# Altium PCB PCB2.PcbDoc
Units mm, origin at the board's own origin, x right, y up, seen from the top; angles counter-clockwise.
Board outline 43.94 x 37.52 mm, 2 copper layers (Top Layer, Bottom Layer); 57 components, 31 nets, 231 pads, 33 vias.
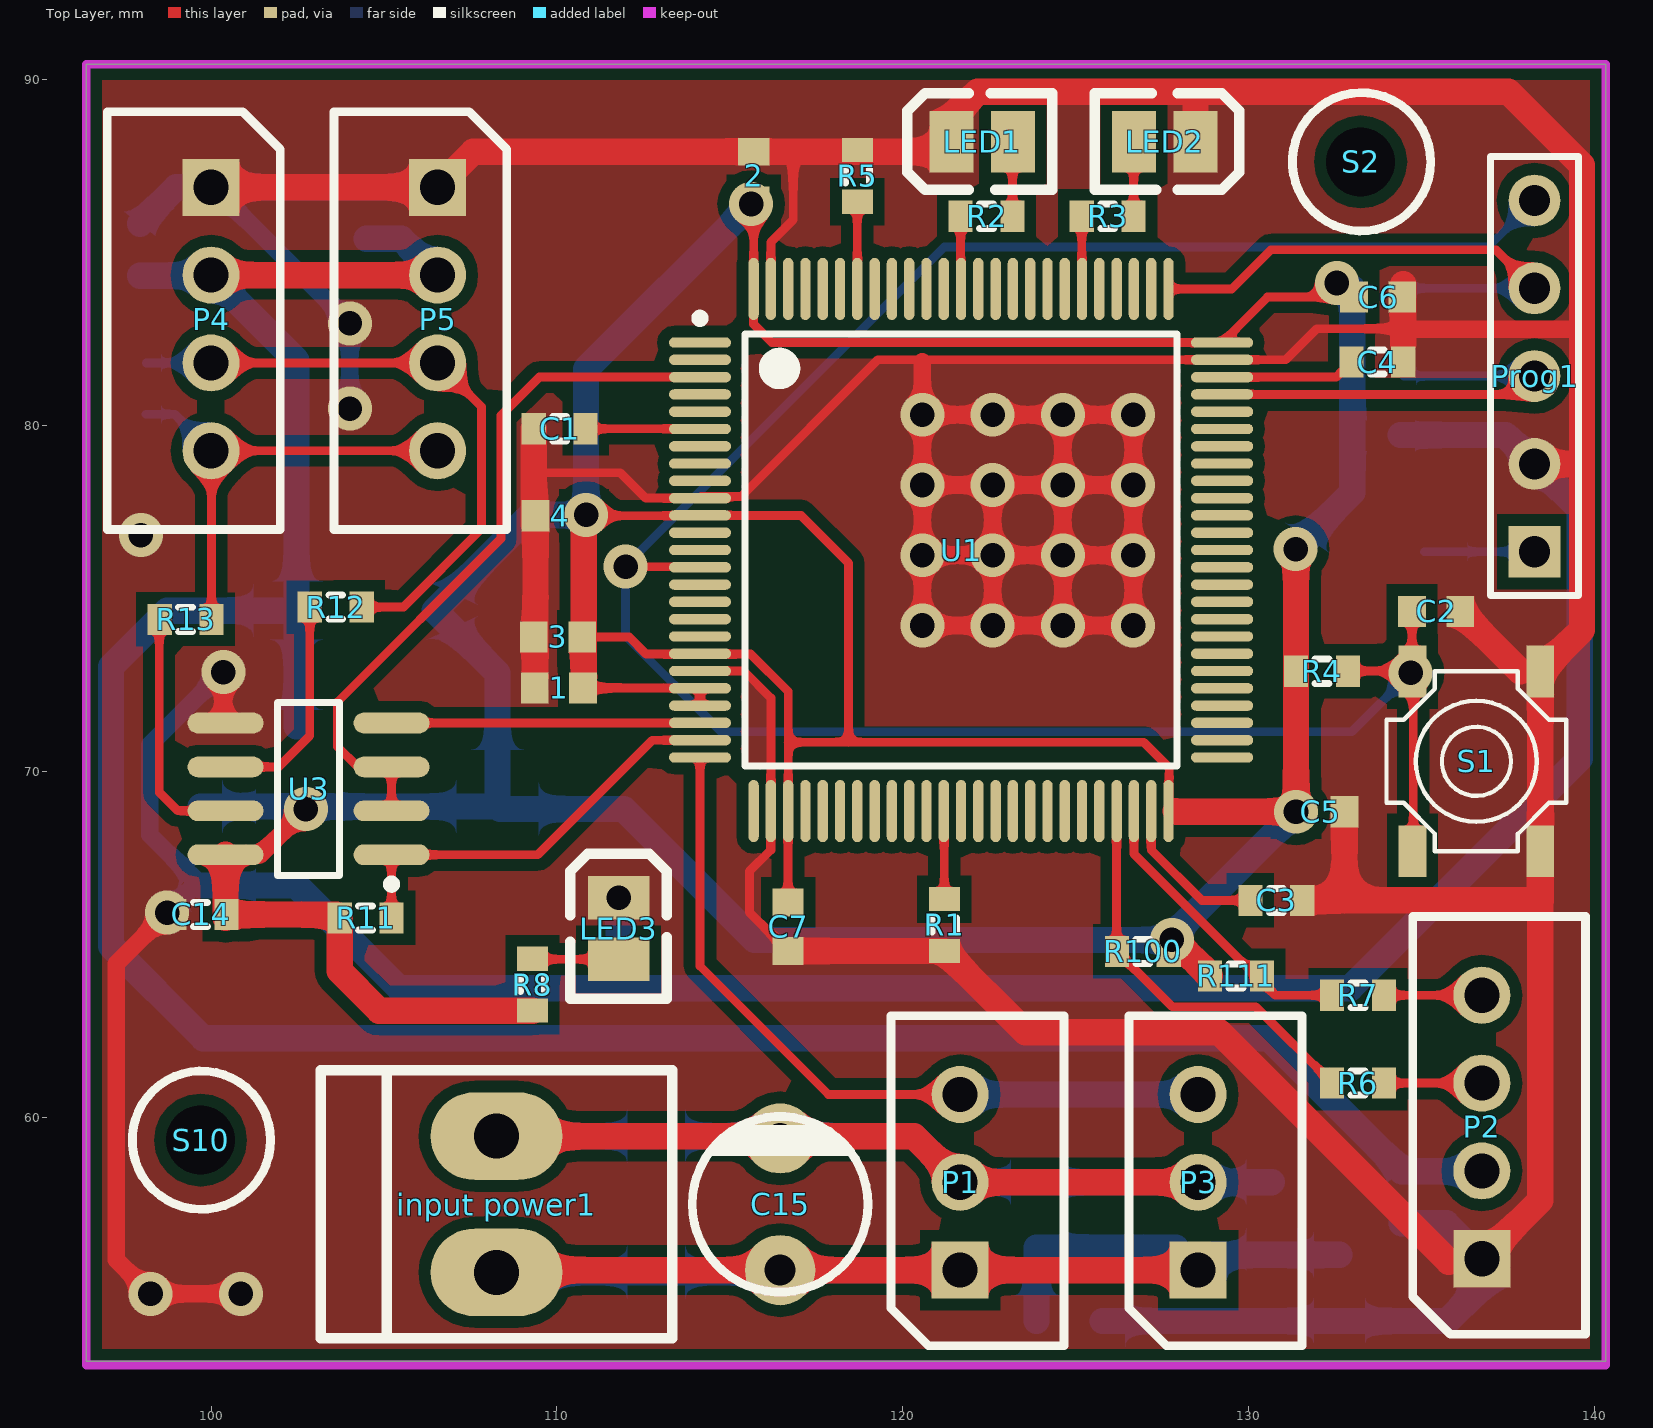
[diagram p0: Top Layer view]
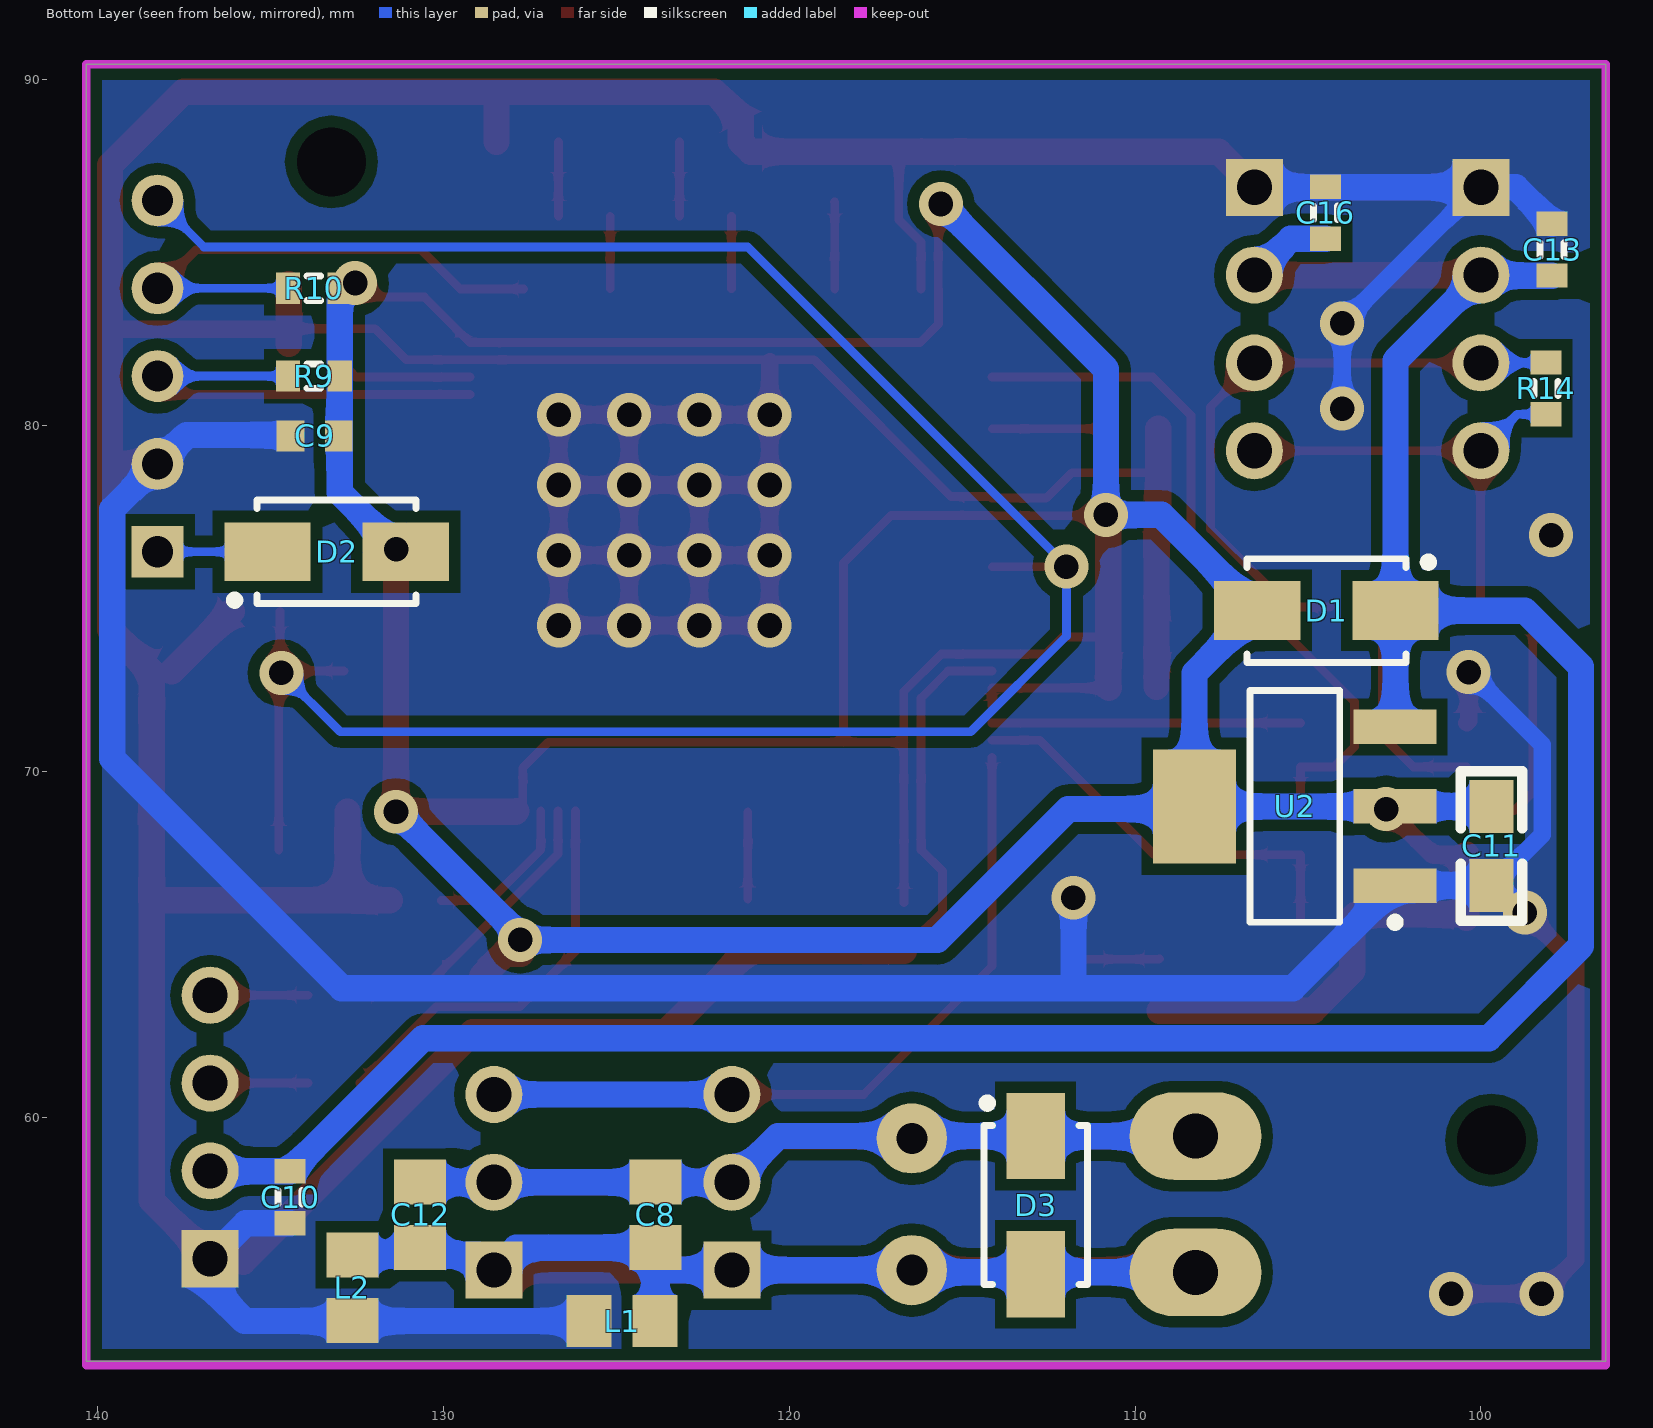
[diagram p1: Bottom Layer view, seen from below]

## Layer stack, top to bottom
Top Solder: solder mask 0.0102, Solder Resist, Dk 3.5
Top Layer: signal copper 0.0356
Dielectric 1: dielectric 0.32, FR-4, Dk 4.8
Bottom Layer: signal copper 0.0356
Bottom Solder: solder mask 0.0102, Solder Resist, Dk 3.5

## Board outline
96.393,52.934 140.335,52.934 140.335,90.449 96.393,90.449

## Design rules (kind name [scope] priority, off if disabled: settings)
AssemblyTestPointUsage [All] p1 off:
AssemblyTestpoint [All] p1 off: testpointundercomponent=TRUE minsize=1.016 maxsize=2.54 preferedsize=1.524 minholesize=0 maxholesize=1.016 preferedholesize=0.813 testpointgrid=0.025 usegrid=TRUE gridtolerance=0 allowsidetop=TRUE allowsidebottom=TRUE
Clearance Clearance_1 [All vs InPolygon] p1: gap=0.33 ignorepadtopadclearanceinfootprint=FALSE except(0: Arc-Hole Track-Hole SMDPad-Hole THPad-Hole Via-Hole Fill-Hole Poly-Hole Region-Hole Text-Hole)
Clearance [All] p2: gap=0.178 ignorepadtopadclearanceinfootprint=FALSE except(0: Arc-Hole Track-Hole SMDPad-Hole THPad-Hole Via-Hole Fill-Hole Poly-Hole Region-Hole Text-Hole)
ComponentClearance [All] p1 off: gap=0.254 collisioncheckmode=3 verticalgap=0.254 showdistances=FALSE
FabricationTestPointUsage [All] p1 off: valid=0 allowmultiple=FALSE
FabricationTestpoint [All] p1 off: side=3 testpointundercomponent=TRUE minsize=1.016 maxsize=2.54 preferedsize=1.524 minholesize=0 maxholesize=1.016 preferedholesize=0.813 testpointgrid=0.025 allowsidetop=TRUE allowsidebottom=TRUE usegrid=TRUE gridtolerance=0
Height [All] p1 off: minheight=0 maxheight=25.4 prefheight=12.7
HoleSize [All] p1 off: absolutevalues=TRUE maxlimit=2.54 minlimit=0.025 maxpercent=80.000 minpercent=20.000
HoleToHoleClearance [All] p1 off: gap=0.254 allowstackedmicrovias=TRUE
LayerPairs [All] p1 off: enforce=TRUE
MinimumSolderMaskSliver [All] p1 off: minsoldermaskwidth=0.254
NetAntennae [All] p1 off: netantennaetolerance=0
PasteMaskExpansion [All] p1 off: expansion=0
PlaneConnect [All] p1: planeconnectstyle=Direct reliefexpansion=0.508 reliefentries=4 reliefconductorwidth=0.254 reliefairgap=0.254
PolygonConnect [All] p1: connectstyle=Direct reliefconductorwidth=0.254 reliefentries=4 polygonreliefangle="90 Angle" airgapwidth=0.254
RoutingVias [All] p1: holewidth=0.4 width=0.8 viastyle="Through Hole" minholewidth=0.3 minwidth=0.6 maxholewidth=0.711 maxwidth=1.27
SilkToSilkClearance [All] p1 off: silktosilkclearance=0.254
SilkToSolderMaskClearance [IsPad] p1 off: minsilkscreentomaskgap=0.254 clearancetoexposedcopper=TRUE
SolderMaskExpansion [All] p1 off: expansion=0.102
Width [All] p1: maxlimit=2.54 minlimit=0.254 preferedwidth=0.254
15 further rules are at their usual default settings.

## Components (designator, comment, footprint, x,y, rotation, side; value= is the part's Value field where it differs from the comment)
1 "" 1608[0603] 110.058,72.415 r0 top
2 "" 1608[0603] 115.697,87.224 r270 top
3 "" 1608[0603] 110.033,73.889 r0 top
4 "" 1608[0603] 110.084,77.394 r0 top
C1 "100uF/6V3" j1-0603 110.084,79.908 r0 top
C2 "" 1608[0603] 135.433,74.625 r180 top
C3 "2.2uF" j1-0603 130.81,66.269 r0 top
C4 "2.2uF" j1-0603 133.731,81.839 r0 top
C5 "" 1608[0603] 132.08,68.834 r180 top
C6 "" 1608[0603] 133.756,83.718 r180 top
C7 "" 1608[0603] 116.688,65.507 r90 top
C8 "Cap" 2012[0805] 123.876,57.175 r90 bottom
C9 "" 1608[0603] 133.731,79.705 r180 bottom
C10 "100nF" J1-0603 134.442,57.683 r90 bottom
C11 "Cap_El" 0805 99.695,67.843 r270 bottom
C12 "Cap" 2012[0805] 130.683,57.175 r90 bottom
C13 "100nF" J1-0603 97.942,85.09 r270 bottom
C14 "Cap" j1-0603 99.695,65.862 r0 top
C15 "Cap Pol1" C 116.459,57.48 r90 top
C16 "100nF" J1-0603 104.496,86.157 r270 bottom
D1 "1N4007" US1M 104.47,74.651 r180 bottom
D2 "1N4007" US1M 133.096,76.352 r0 bottom
D3 "" us1m 112.878,57.455 r90 bottom
"input power1" "Header 2" CON2-TIWAN 108.255,57.48 r270 top
L1 "" 2012[0805] 124.841,54.102 r180 bottom
L2 "" 2012[0805] 132.639,55.067 r90 bottom
LED1 "power" 3518 122.301,88.214 r180 top
LED2 "power" 3518 127.584,88.214 r0 top
LED3 "power" 3518 111.785,65.456 r90 top
P1 "AX" "jp circular 3" 121.666,55.575 r90 top
P2 "I2C_EXT" "jp circular 4" 136.754,55.905 r90 top
P3 "AX" "jp circular 3" 128.549,55.575 r90 top
P4 "RS_485" "jp circular 4" 100,86.893 r270 top
P5 "RS_485" "jp circular 4" 106.553,86.893 r270 top
Prog1 "Progrommer" HDR1x5 138.278,76.352 r90 top
R1 "10K" J1-0603 121.209,65.557 r90 top
R2 "Res1" j1-0603 122.428,86.055 r0 top
R3 "Res1" j1-0603 125.933,86.055 r0 top
R4 "10K" J1-0603 132.131,72.898 r0 top
R5 "10K" J1-0603 118.694,87.224 r270 top
R6 "Res1" j1-0603 133.172,60.985 r0 top
R7 "Res1" j1-0603 133.172,63.525 r0 top
R8 "Res1" j1-0603 109.296,63.83 r90 top
R9 "" J1-0603 133.756,81.432 r180 bottom
R10 "" J1-0603 133.756,83.972 r180 bottom
R11 "Res1" j1-0603 104.47,65.761 r0 top
R12 "Res1" j1-0603 103.607,74.752 r0 top
R13 "Res1" j1-0603 99.263,74.397 r0 top
R14 "Res1" j1-0603 98.12,81.077 r270 bottom
R100 "4.7K" J1-0603 126.949,64.795 r180 top
R111 "4.7K" J1-0603 129.642,64.084 r0 top
S1 "SW-PB" SW-PB-4P 134.747,67.691 r90 top
S2 "Screw Hole" "Screw Holw 3-6 mm" 133.274,87.63 r0 top
S10 "Screw Hole" "Screw Holw 3-6 mm" 99.72,59.334 r0 top
U1 "STM32F40X_41X-SQ100" 100A_N 121.691,76.403 r0 top
U2 "REG1117-3.3" SOT223 105.385,68.986 r0 bottom
U3 "MAX485CSA" NSO8_N 102.819,69.494 r180 top

## Footprints (in the part's own frame and the unit in brackets; to place one, negate y for a bottom-side part, rotate by r counter-clockwise, add the part's x,y. Pads: shape width x height; smd on the part's side, far side on the other; paste and mask are expansions set on the pad)
100A_N [mm] "Thin QFP, 100-Leads, Body 14x14mm, Pitch 0.5mm, IPC Medium Density"
  oval 1.8x0.3 smd: 1(-7.55,6) 2(-7.55,5.5) 3(-7.55,5) 4(-7.55,4.5) 5(-7.55,4) 6(-7.55,3.5) 7(-7.55,3) 8(-7.55,2.5) 9(-7.55,2) 10(-7.55,1.5) 11(-7.55,1) 12(-7.55,0.5) 13(-7.55,0) 14(-7.55,-0.5) 15(-7.55,-1) 16(-7.55,-1.5) 17(-7.55,-2) 18(-7.55,-2.5) 19(-7.55,-3) 20(-7.55,-3.5) 21(-7.55,-4) 22(-7.55,-4.5) 23(-7.55,-5) 24(-7.55,-5.5) 25(-7.55,-6) 51(7.55,-6) 52(7.55,-5.5) 53(7.55,-5) 54(7.55,-4.5) 55(7.55,-4) 56(7.55,-3.5) 57(7.55,-3) 58(7.55,-2.5) 59(7.55,-2) 60(7.55,-1.5) 61(7.55,-1) 62(7.55,-0.5) 63(7.55,0) 64(7.55,0.5) 65(7.55,1) 66(7.55,1.5) 67(7.55,2) 68(7.55,2.5) 69(7.55,3) 70(7.55,3.5) 71(7.55,4) 72(7.55,4.5) 73(7.55,5) 74(7.55,5.5) 75(7.55,6)
  oval 0.3x1.8 smd: 26(-6,-7.55) 27(-5.5,-7.55) 28(-5,-7.55) 29(-4.5,-7.55) 30(-4,-7.55) 31(-3.5,-7.55) 32(-3,-7.55) 33(-2.5,-7.55) 34(-2,-7.55) 35(-1.5,-7.55) 36(-1,-7.55) 37(-0.5,-7.55) 38(0,-7.55) 39(0.5,-7.55) 40(1,-7.55) 41(1.5,-7.55) 42(2,-7.55) 43(2.5,-7.55) 44(3,-7.55) 45(3.5,-7.55) 46(4,-7.55) 47(4.5,-7.55) 48(5,-7.55) 49(5.5,-7.55) 50(6,-7.55) 76(6,7.55) 77(5.5,7.55) 78(5,7.55) 79(4.5,7.55) 80(4,7.55) 81(3.5,7.55) 82(3,7.55) 83(2.5,7.55) 84(2,7.55) 85(1.5,7.55) 86(1,7.55) 87(0.5,7.55) 88(0,7.55) 89(-0.5,7.55) 90(-1,7.55) 91(-1.5,7.55) 92(-2,7.55) 93(-2.5,7.55) 94(-3,7.55) 95(-3.5,7.55) 96(-4,7.55) 97(-4.5,7.55) 98(-5,7.55) 99(-5.5,7.55) 100(-6,7.55)
  silkscreen extent -7.67,-6.25 6.25,6.82, body extent -7,-7 7,7, height 1.2
0805 [mil]
  rect 60x50 smd: 1(-45,0) 2(45,0)
  silkscreen extent -85,-35 85,35
1608[0603] [mm] "Chip Capacitor, Body 1.6x0.8mm, IPC High Density"
  rect 0.8x0.9 smd: 1(-0.7,0) 2(0.7,0)
  body extent -0.87,-0.48 0.87,0.48, height 1.3
2012[0805] [mm] "Chip Resistor; Body 2.0 x 1.3 mm (LxW typ)"
  rect 1.3x1.5 smd: 1(-0.95,0) 2(0.95,0)
  body extent -1.22,-0.75 1.28,0.75, height 0.5
3518 [mil]
  rect 50x70 smd: 1(35,0) 2(-35,0)
  silkscreen extent -80,-55 85,55, body extent -63,-31 63,32, height 43
C [mil]
  round 80 hole 35.43: 1(-75,0) 2(75,0)
  silkscreen extent -100,-100 100,100
CON2-TIWAN [mm]
  oval 2.54x3.81 hole 1.3: 1(-1.968,0) 2(1.968,0)
  silkscreen extent -3.87,-5.08 3.87,5.08
HDR1x5 [mm] "Connector; Header; 5 Position"
  rect 1.5x1.5 hole 0.9: 1(0,0)
  round 1.5 hole 0.9: 2(2.54,0) 3(5.08,0) 4(7.62,0) 5(10.16,0)
  silkscreen extent -1.27,-1.27 11.43,1.27
j1-0603 [mm] "Chip Resistor, Body 1.6x0.8mm, IPC High Density"
  rect 0.7x0.9 smd: 1(-0.75,0) 2(0.75,0)
  silkscreen extent -0.2,-0.35 0.2,0.35, body extent -0.85,-0.48 0.85,0.48, height 0.9
J1-0603 [mm] "Chip Resistor, Body 1.6x0.8mm, IPC High Density"
  rect 0.7x0.9 smd: 1(-0.75,0) 2(0.75,0)
  silkscreen extent -0.2,-0.35 0.2,0.35, body extent -0.85,-0.48 0.85,0.48, height 0.9
"jp circular 3" [mil]
  rect 65x65 hole 40: 1(0,0)
  round 65 hole 40: 2(100,0) 3(200,0)
  silkscreen extent -86,-118 290,79
"jp circular 4" [mil]
  rect 65x65 hole 40: 1(0,0)
  round 65 hole 40: 2(100,0) 3(200,0) 4(300,0)
  silkscreen extent -86,-118 390,79
NSO8_N [mm] "SOIC, 8-Leads, Body 4.9x3.9mm, Pitch 1.27mm, IPC Medium Density"
  oval 2.2x0.6 smd: 1(-2.4,1.905) 2(-2.4,0.635) 3(-2.4,-0.635) 4(-2.4,-1.905) 5(2.4,-1.905) 6(2.4,-0.635) 7(2.4,0.635) 8(2.4,1.905)
  silkscreen extent -2.53,-2.5 0.9,2.88, body extent -2,-2.5 2,2.5, height 1.75
"Screw Holw 3-6 mm" [mm]
  round 0 hole 2: 0(-0.025,0)
  silkscreen extent -2,-2 2,2
SOT223 [mm] "SOT223, 4-Leads, Body 6.7x7.3mm (max), Pitch 2.30mm, IPC Medium Density"
  rect 2.4x1 smd: 1(-2.9,2.3) 2(-2.9,0) 3(-2.9,-2.3)
  rect 2.4x3.3 smd: 4(2.9,0)
  silkscreen extent -3.02,-3.35 1.3,3.47, body extent -1.85,-3.35 1.85,3.35, height 1.8
SW-PB-4P [mm]
  rect 1.5x0.8 smd: 1(0,0) 1(5.2,0) 2(0,-3.7) 2(5.2,-3.7)
  silkscreen extent 0,-4.45 5.2,0.75, body extent 0,-4.45 5.22,0.75, height 2.2
US1M [mm] "Molded Diode, 2-Leads, Body 4.3x2.6mm, IPC Medium Density"
  rect 2.5x1.7 smd: 1(-2,0) 2(2,0)
  silkscreen extent -2.3,-1.5 3.07,1.52, body extent -2.3,-1.46 2.3,1.46, height 2.3
us1m [mm] "Molded Diode, 2-Leads, Body 4.3x2.6mm, IPC Medium Density"
  rect 2.5x1.7 smd: 1(-2,0) 2(2,0)
  silkscreen extent -2.3,-1.5 3.07,1.53, body extent -2.3,-1.46 2.3,1.46, height 2.3

## Part data
1 2 3 4 C1 C2 C5 C6 C7 C9 C10 C13 C16: library part Cap, "Capacitor"
C3 C4: library part Cap_UP, "Capacitor"
C8 C11 C12 C14: "Capacitor"
C15: "Polarized Capacitor (Radial)"
D1 D2: library part Diode, "1 Amp General Purpose Rectifier"
D3: library part Diode, "Default Diode"
"input power1": "Header, 2-Pin"
L1 L2: library part Inductor, "Inductor"
LED1 LED2 LED3: library part LED3, "Typical BLUE SiC LED"
P1 P3: library part "Header 3", "Header, 3-Pin"
P2 P4 P5: library part "Header 4", "Header, 4-Pin"
Prog1: library part "Header 5", "Header, 5-Pin"
R1 R4 R5 R100 R111: library part Res1, "Resistor"
R2 R3 R6 R7 R8 R11 R12 R13 R14: "Resistor"
R9 R10: library part Res, "Semiconductor Resistor"
S1: "Switch"
U2: "800mA and 1A Low Dropout Positive Regulator 2.85V, 3.3V, 5V, and Adjustable"
U3: "Low-Power, Slew-Rate-Limited RS-485/RS-422 Transceiver"

## Via types
v1: diameter 1.27, hole 0.711, Top Layer to Bottom Layer, tented both sides, 33 vias

## Nets (pads, with @x,y where several pads share a name; then routed paths per layer and width w, separated by ;. In a path a pad name is that pad's centre, name@x,y a point inside that pad or via, vN(x,y) a via of type N, cw(c..) or ccw(c..) an arc to the next point about the centre after c; other vN are vias at no path point)
1WIRE: P1.3 P3.3 U1.25 | length 22
  Top Layer w0.254: U1.25 114.141,64.37 117.856,60.655 P1.3
  Bottom Layer w0.762: P1.3 P3.3
+3.3: 1.2 2.2 3.2 4.2 C5.2 C6.2 C7.2 C9.2 C11.1 C14.2 D1.1 D2.1 R4.1 R8.1 R9.2 R10.2 R11.1 R100.1 R111.1 U1.11 U1.19 U1.21 U1.22 U1.28 U1.50 U1.75 U1.100 U2.2 U2.4 U3.8 | length 163.9
  Top Layer w0.254: 3.2 110.784,73.889 112.09,73.889 112.587,73.392 115.61,73.392 116.691,72.31 116.691,70.841 ; 1.2 114.129,72.415 U1.21 U1.22 ; 4.2 U1.11@114.132,77.394 ; U1.11 117.059,77.403 118.44,76.022 118.44,70.841 ; U1.100 115.691,82.931 116.219,82.403 U1.75 130.557,83.718 C6.2 ; U1.100@115.697,83.959 2.2 ; C7.2 U1.28@116.688,68.849 ; U1.28 116.691,70.841 ; U1.50@127.711,68.873 127.711,70.104 126.975,70.841 118.44,70.841 ; v1(132.563,84.125) v1@132.65,84.125 ; 116.691,70.841 118.44,70.841
  Top Layer w0.508: U3.8 101.422,67.589 v1(102.743,68.91)
  Top Layer w0.762: C14.2@100.419,65.762 U3.8 ; C14.2 103.619,65.862 R11.1 103.72,64.225 104.865,63.08 R8.1 ; 1.2 110.784,72.441 110.784,73.889 4.2 ; R100.1@127.769,64.725 128.251,64.725 R111.1 ; 127.9,68.853 127.919,68.834 v1(131.38,68.834) ; v1(131.369,76.429) 131.381,76.417 R4.1 C5.2@131.381,68.835
  Bottom Layer w0.254: v1(132.563,84.125) 132.854,84.125 R10.2
  Bottom Layer w0.508: U2.2@102.667,68.986 v1(102.743,68.91)
  Bottom Layer w0.762: C11.1 U2.2 102.667,68.986 U2.4 108.285,72.836 D1.1 109.239,77.419 v1(110.846,77.419) 110.846,81.636 v1(115.621,86.411) ; U2.4@108.361,68.91 111.938,68.91 115.722,65.126 v1(127.787,65.126) 127.787,65.241 v1(131.38,68.834) ; v1(131.369,76.429) 133.006,78.066 R9.2 R10.2
+5: C10.2 C13.2 C16.2 D1.2 P2.2 P4.2 P5.2 U2.3 | length 81.6
  Top Layer w0.762: P4.2 P5.2
  Bottom Layer w0.762: C13.2 99.986,84.34 P4.2 102.47,81.883 D1.2 ; U2.3@102.47,71.301 D1.2 ; C16.2 105.5,85.407 P5.2 ; P2.2@136.742,58.433 C10.2 130.595,62.281 99.771,62.281 97.104,64.948 97.104,73.025 98.73,74.651 D1.2
+12: "input power1.1" C8.2 C12.2 C15.2 D3.2 P1.2 P3.2 | length 43.8
  Top Layer w0.762: 108.255,59.449 120.332,59.449 P1.2 P3.2
  Bottom Layer w0.762: 108.255,59.449 112.872,59.449 D3.2 120.326,59.455 P1.2 P3.2 130.673,58.115 C12.2
A_RESET: C2.2 Prog1.5 R4.2 S1.1 U1.14 | length 68.1
  Top Layer w0.254: v1(111.989,75.921) U1.14@114.124,75.921 ; R4.2 132.888,72.905 S1.1@134.696,72.905 ; S1.1@134.733,72.905 C2.2 ; S1.1@134.772,67.716 S1.1@134.772,72.847
  Bottom Layer w0.254: v1(134.696,72.847) 132.994,71.145 114.757,71.145 111.989,73.914 v1(111.989,75.921) 111.989,75.946 121.209,85.166 136.931,85.166 Prog1.5
D+: P4.3 P5.3 R12.2 R14.1 | length 18.1
  Top Layer w0.254: P4.3 P5.3 107.823,80.543 107.823,77.013 105.562,74.752 R12.2
  Bottom Layer w0.254: R14.1@98.134,81.813 P4.3
D-: P4.4 P5.4 R13.2 R14.2 | length 13.7
  Top Layer w0.254: P4.4 P5.4 ; R13.2 P4.4@100.013,79.26
  Bottom Layer w0.254: R14.2 98.946,80.327 P4.4
EN_MAX: U1.3 U3.2 U3.3 | length 20.8
  Top Layer w0.254: U3.2 U3.3 104.242,70.129 103.657,70.714 103.657,72.009 108.382,76.733 108.382,80.289 109.496,81.403 U1.3
GND: 1.1 2.1 3.1 4.1 C1.1 C2.1 C3.2 C4.2 C5.1 C6.1 C7.1 C9.1 C10.1 C11.2 C13.1 C14.1 C16.1 L1.1 L2.1 LED1.1 LED2.1 LED3.1 P2.1 P4.1 P5.1 Prog1.2 R1.1 R5.1 S1.2 U1.10 U1.20 U1.27 U1.74 U1.99 U2.1 U3.5 | length 333.8
  Top Layer w0.254: 109.359,78.638 111.836,78.638 112.571,77.903 U1.10 114.187,77.948 115.328,77.948 119.283,81.903 U1.74 131.078,81.903 131.978,82.804 134.481,82.804 ; U1.20 115.412,72.903 116.191,72.124 U1.27 116.191,67.728 115.57,67.107 115.57,65.924 C7.1 ; 2.1@115.697,87.805 2.1 ; U1.99 116.191,85.305 116.84,85.954 116.84,87.924 116.84,87.935
  Top Layer w0.508: v1(98.73,65.913) 97.257,64.44 97.257,55.88 v1(98.247,54.889) v1(100.863,54.889) ; v1(100.355,72.873) 100.355,71.463 U3.5@100.406,71.412 ; 120.574,81.844 v1(120.574,80.315) v1(122.606,80.315) v1(124.638,80.315) ; v1@120.701,80.01 120.574,79.883 v1(120.574,78.283) ; v1@122.834,78.435 v1@122.682,78.283 ; 134.481,82.804 134.494,82.791 139.637,82.791 ; v1(120.574,76.251) v1(122.606,76.251) ; v1(120.574,76.251) v1(120.574,78.283) ; v1(120.574,76.251) v1(120.574,74.219) v1(122.606,74.219) ; v1(120.574,78.283) v1(122.606,78.283) v1@122.682,78.283 ; v1(122.606,74.219) v1(122.606,76.251) ; v1(122.606,74.219) v1(124.638,74.219) ; v1(122.606,76.251) 122.606,78.207 v1@122.682,78.283 ; v1(122.606,76.251) v1(124.638,76.251) ; v1@122.682,78.283 v1(124.638,78.283) ; v1(124.638,74.219) v1(124.638,76.251) ; v1(124.638,74.219) v1(126.67,74.219) v1(126.67,76.251) ; v1(124.638,76.251) v1(126.67,76.251) ; v1(124.638,76.251) v1(124.638,78.283) ; v1(124.638,78.283) v1(126.67,78.283) ; v1(124.638,78.283) v1(124.638,80.315) ; v1(124.638,80.315) v1(126.67,80.315) v1(126.67,78.283) ; v1(126.67,76.251) v1(126.67,78.283)
  Top Layer w0.762: P4.1 P5.1 107.583,87.924 2.1 116.84,87.924 121.121,87.924 LED1.1 121.412,88.9 122.174,89.662 137.516,89.662 139.649,87.528 139.649,74.093 138.447,72.891 138.447,67.691 138.447,66.167 ; 4.1@109.334,77.142 C1.1 ; 1.1@109.384,72.441 4.1 ; C7.1 R1.1@121.208,64.807 ; R1.1 123.558,62.459 129.159,62.459 135.801,55.816 ; LED2.1 128.473,89.281 ; C3.2 132.78,66.269 ; C5.1 132.78,66.269 ; 134.481,82.372 134.481,82.804 C6.1@134.481,84.086 ; C2.1 137.867,72.891 ; P2.1 138.447,57.599 138.447,66.167 ; Prog1.2 139.548,78.892 ; 132.78,66.269 138.345,66.269 138.447,66.167
  Bottom Layer w0.508: v1(98.73,65.913) C11.2@99.466,66.65 ; C11.2@99.466,66.7 C11.2 98.222,68.174 98.222,70.764 v1@100.228,72.771 ; P4.1@100.076,86.893 v1(104.013,82.956) v1(104.013,80.493)
  Bottom Layer w0.762: C13.1 98.996,86.893 P4.1 100.076,86.893 P5.1 ; C11.2 U2.1@102.471,66.7 ; U2.1 105.442,63.729 111.912,63.729 ; v1(111.785,66.345) 111.785,63.856 111.912,63.729 ; L1.1 135.763,54.102 136.754,55.093 P2.1 135.726,56.933 C10.1 ; C9.1@134.406,79.731 137.439,79.731 Prog1.2 139.586,77.584 139.586,70.371 132.944,63.729 111.912,63.729
  other v1: 97.968,76.835
LED1: R2.1 U1.88 | length 2.1
  Top Layer w0.254: U1.88@121.678,83.967 R2.1
LED2: R3.1 U1.81 | length 2.1
  Top Layer w0.254: U1.81@125.183,83.961 R3.1
NetC1_2: C1.2 U1.6 | length 3.3
  Top Layer w0.254: C1.2 U1.6@114.136,79.908
NetC3_1: C3.1 U1.49 | length 4.6
  Top Layer w0.254: U1.49 127.191,67.728 128.651,66.269 C3.1
NetC4_1: C4.1 U1.73 | length 3.9
  Top Layer w0.254: U1.73 132.545,81.403 C4.1
NetD2_2: D2.2 Prog1.1 | length 3.2
  Bottom Layer w0.254: D2.2 Prog1.1
NetLED1_1: LED1.2 R2.2 | length 2.1
  Top Layer w0.254: R2.2 LED1.2@123.178,88.202
NetLED2_1: LED2.2 R3.2 | length 2.1
  Top Layer w0.254: R3.2 LED2.2@126.683,88.202
NetLED3_1: LED3.2 R8.2 | length 2.5
  Top Layer w0.254: R8.2 109.31,64.567 LED3.2
NetP2_3: P2.3 R6.2 | length 2.8
  Top Layer w0.254: R6.2 P2.3
NetP2_4: P2.4 R7.2 | length 2.8
  Top Layer w0.254: R7.2 P2.4
NetR1_2: R1.2 U1.37 | length 2.5
  Top Layer w0.254: R1.2 U1.37@121.209,68.836
NetR5_2: R5.2 U1.94 | length 2.5
  Top Layer w0.254: U1.94 118.691,86.471 R5.2
NetR12_1: R12.1 U3.6 | length 6.5
  Top Layer w0.254: U3.6 101.956,70.129 102.857,71.03 R12.1
NetR13_1: R13.1 U3.7 | length 7.1
  Top Layer w0.254: R13.1@98.501,74.359 98.501,69.393 99.035,68.859 U3.7
PGND: "input power1.2" C8.1 C12.1 C15.1 D3.1 L1.2 L2.2 P1.1 P3.1 | length 47.3
  Top Layer w0.762: 108.255,55.512 108.318,55.575 C15.1 P1.1 P3.1
  Bottom Layer w0.762: 108.255,55.512 116.395,55.512 C15.1 P1.1 123.825,55.575 ; L1.2@123.876,54.102 C8.1 127.899,56.225 P3.1 128.991,56.017 L2.2
RXUSART: R11.2 U1.24 U3.1 | length 12.1
  Top Layer w0.254: R11.2 U3.1 109.449,67.589 112.762,70.903 U1.24
SCL: R6.1 R100.2 U1.47 | length 11.9
  Top Layer w0.254: R100.2@126.191,64.803 U1.47 ; R100.2 127.799,63.195 130.212,63.195 R6.1
SDA: R7.1 R111.2 U1.48 | length 8.7
  Top Layer w0.254: U1.48 126.691,67.618 130.784,63.525 R7.1
SWCLK: Prog1.4 R10.1 U1.76 | length 15.3
  Top Layer w0.254: U1.76 129.521,83.953 130.658,85.09 137.16,85.09 Prog1.4
  Bottom Layer w0.254: R10.1 Prog1.4
SWDIO: Prog1.3 R9.1 U1.72 | length 13
  Top Layer w0.254: U1.72 137.748,80.903 Prog1.3
  Bottom Layer w0.254: R9.1 Prog1.3
TXUSART: U1.23 U3.4 | length 8.9
  Top Layer w0.254: U3.4 114.138,71.399 U1.23
pads on no net: S2.0 S10.0 U1.1 U1.2 U1.4 U1.5 U1.7 U1.8 U1.9 U1.12 U1.13 U1.15 U1.16 U1.17 U1.18 U1.26 U1.29 U1.30 U1.31 U1.32 U1.33 U1.34 U1.35 U1.36 U1.38 U1.39 U1.40 U1.41 U1.42 U1.43 U1.44 U1.45 U1.46 U1.51 U1.52 U1.53 U1.54 U1.55 U1.56 U1.57 U1.58 U1.59 U1.60 U1.61 U1.62 U1.63 U1.64 U1.65 U1.66 U1.67 U1.68 U1.69 U1.70 U1.71 U1.77 U1.78 U1.79 U1.80 U1.82 U1.83 U1.84 U1.85 U1.86 U1.87 U1.89 U1.90 U1.91 U1.92 U1.93 U1.95 U1.96 U1.97 U1.98

## Polygon pours and split planes (outlines as drawn)
GND on Bottom Layer "Top Layer-No Net" (solid, remove dead copper, pour order 2): 140.335,90.449 96.393,90.449 96.393,52.832 140.335,52.832
GND on Top Layer "Top Layer-No Net" (solid, remove dead copper, pour order 4): 140.335,90.449 96.393,90.449 96.393,52.832 140.335,52.832

## Keep-outs
Keep-Out Layer:
  lines w0.254: 96.393,52.832 140.335,52.832 140.335,90.449 96.393,90.449 96.393,52.832